# Altium PCB PCB1.PcbDoc
Units mm, origin at the board's own origin, x right, y up, seen from the top; angles counter-clockwise.
Board outline 40.04 x 64.55 mm, 2 copper layers (Top Layer, Bottom Layer); 12 components, 9 nets, 44 pads, 4 vias.
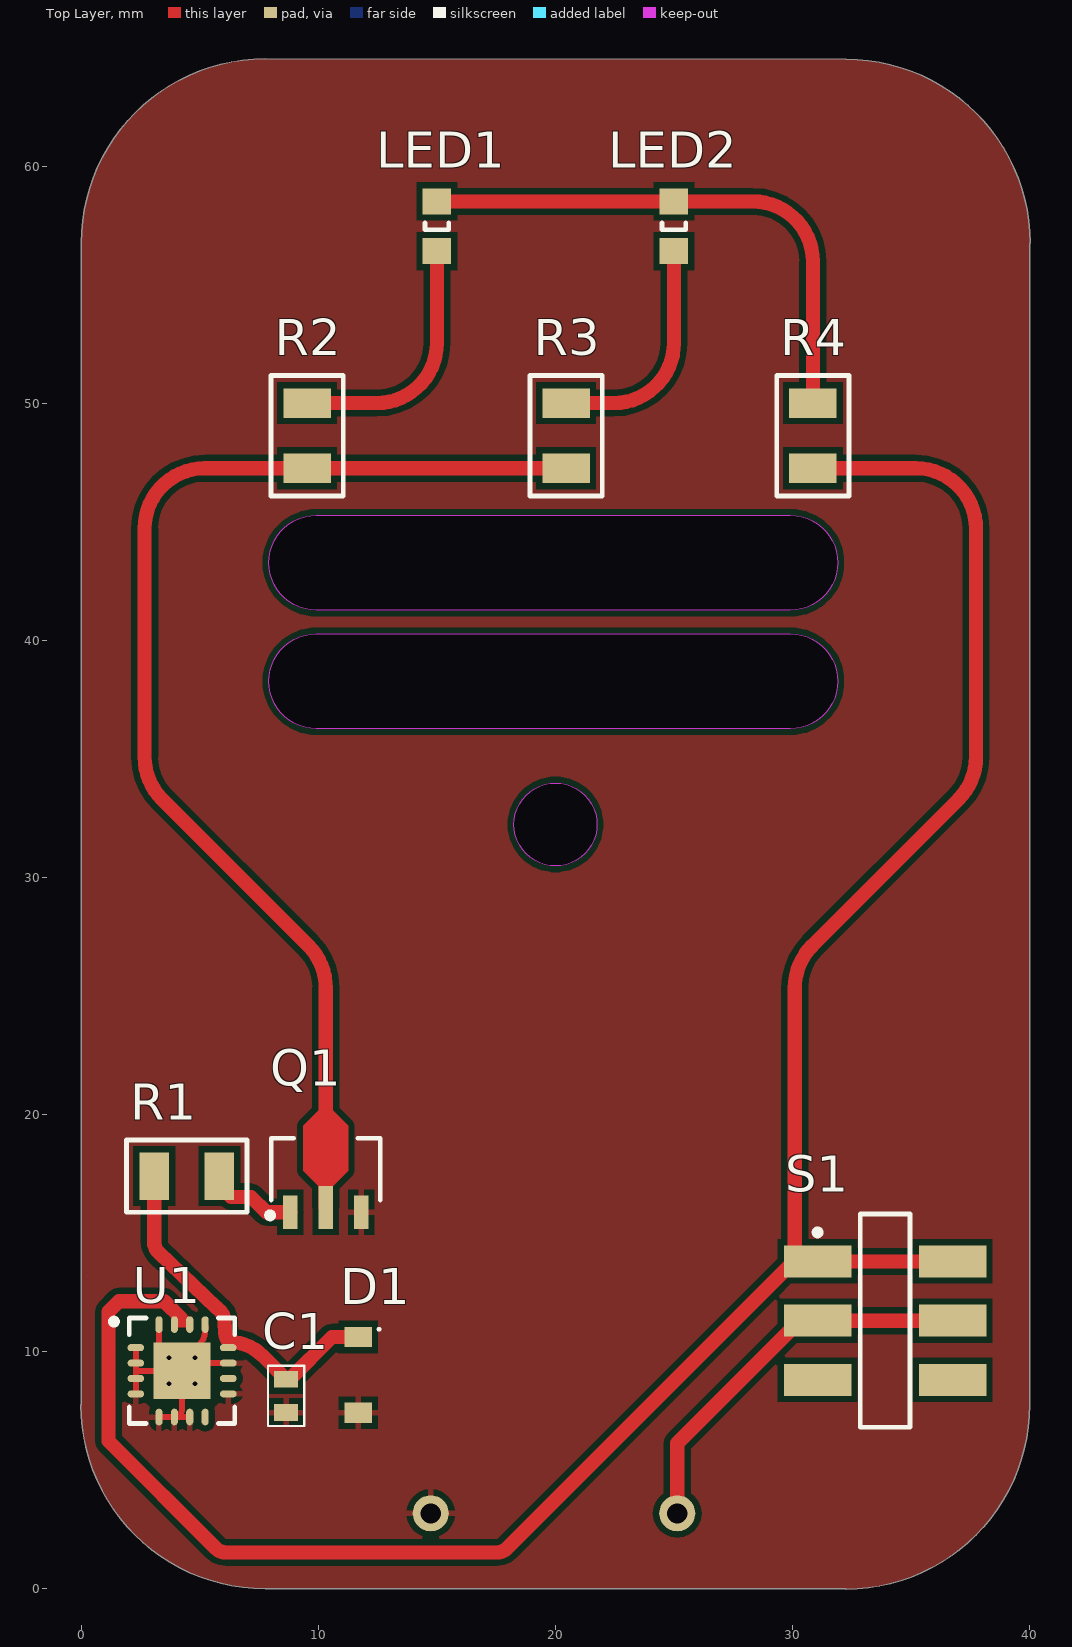
[diagram p0: Top Layer view]
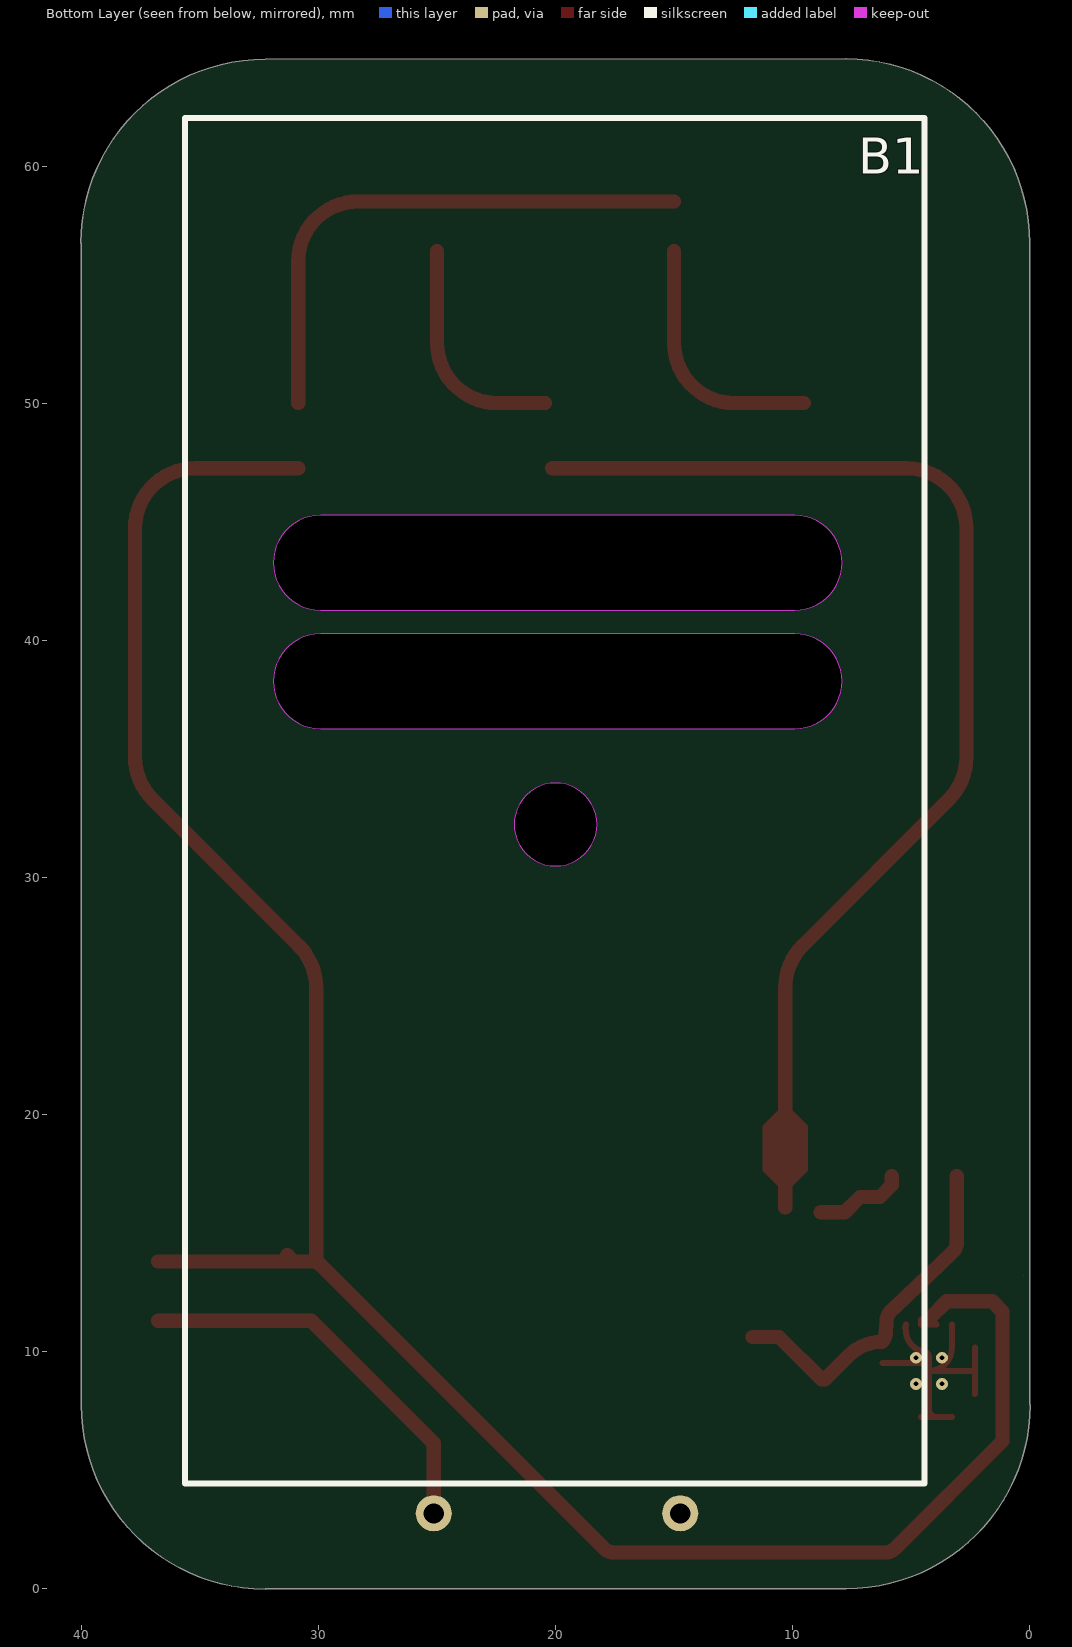
[diagram p1: Bottom Layer view, seen from below]

## Layer stack, top to bottom
Top Solder: solder mask 0.0102, Solder Resist, Dk 3.5
Top Layer: signal copper 0.0356
Dielectric 1: dielectric 0.32, FR-4, Dk 4.8
Bottom Layer: signal copper 0.0356
Bottom Solder: solder mask 0.0102, Solder Resist, Dk 3.5

## Board outline
7.747,-0.001 cw(c7.728,7.744) -0.017,7.747 0,7.747 0,56.769 -0.001,56.769 cw(c7.744,56.788) 7.747,64.533 32.258,64.516 32.258,64.517 cw(c32.277,56.772) 40.022,56.769 40.005,56.769 40.005,7.747 40.006,7.747 cw(c32.261,7.728) 32.258,-0.017 32.258,0
cut-out: 29.913,36.281 9.913,36.281 cw(c9.913,38.281) 9.913,40.281 29.913,40.281 cw(c29.913,38.281)
cut-out: 20,30.488 cw(c20,32.238) 18.25,32.238 cw(c20,32.238) 20,33.988 cw(c20,32.238) 21.75,32.238 cw(c20,32.238)
cut-out: 29.913,41.279 9.913,41.279 cw(c9.913,43.279) 9.913,45.279 29.913,45.279 cw(c29.913,43.279)
cut-out: 0.254,13.208

## Design rules (kind name [scope] priority, off if disabled: settings)
Clearance Clearance_1 [All] p1: gap=0.254 ignorepadtopadclearanceinfootprint=FALSE except(0: Arc-Hole Track-Hole SMDPad-Hole THPad-Hole Via-Hole Fill-Hole Poly-Hole Region-Hole Text-Hole)
Clearance [All] p2: gap=0.254 ignorepadtopadclearanceinfootprint=FALSE except(0: Arc-Hole Track-Hole SMDPad-Hole THPad-Hole Via-Hole Fill-Hole Poly-Hole Region-Hole Text-Hole)
MinimumSolderMaskSliver [All] p1: minsoldermaskwidth=0.145
PolygonConnect [All] p1: connectstyle=Relief reliefconductorwidth=0.254 reliefentries=4 polygonreliefangle="90 Angle" airgapwidth=0.254
RoutingCorners [All] p1: cornerstyle=Round minsetback=2.54 maxsetback=2.54
RoutingVias [All] p1: holewidth=0.711 width=1.27 viastyle="Through Hole" minholewidth=0.711 minwidth=1.27 maxholewidth=0.711 maxwidth=1.27
SilkToSolderMaskClearance [IsPad] p1: minsilkscreentomaskgap=0.1 clearancetoexposedcopper=TRUE
SolderMaskExpansion [All] p1: expansion=0.102 istentingtop=FALSE
Width [All] p1: maxlimit=1 minlimit=0.254 preferedwidth=0.6
27 further rules are at their usual default settings.

## Classes and differential pairs
component class Sheet1: B1 C1 D1 LED1 LED2 Q1 R1 R2 R3 R4 S1

## Components (designator, comment, footprint, x,y, rotation, side; value= is the part's Value field where it differs from the comment)
B1 "SN3-2PC" "BATTERY HOLDER" 19.939,3.937 r0 bottom
C1 "Cap" "Capacitor 0603" 8.636,8.128 r90 top value=4.7μF
D1 "RB168M-40TR" SODFL350X90-2N 11.684,9.017 r270 top
LED1 "150080RS75000" 0805_A 15,57.474 r90 top
LED2 "150080RS75000" 0805_A 25,57.474 r90 top
Q1 "2SC5785(TE12L,F)" SOT89-150P410X160-3N 10.311,17.675 r90 top
R1 "Res1" "Resistor 1206" 4.445,17.399 r0 top value=3.8K
R2 "Res1" "Resistor 1206" 9.525,48.641 r90 top value=50R
R3 "Res1" "Resistor 1206" 20.447,48.641 r90 top value=50R
R4 "Res1" "Resistor 1206" 30.861,48.641 r270 top value=50R
S1 "SW-SPDT" "JS202011SCQN Switch" 33.909,11.303 r0 top
U1 "ADXL335BCPZ" ADI-CP-16-14_L 4.247,9.189 r0 top

## Footprints (in the part's own frame and the unit in brackets; to place one, negate y for a bottom-side part, rotate by r counter-clockwise, add the part's x,y. Pads: shape width x height; smd on the part's side, far side on the other; paste and mask are expansions set on the pad)
0805_A [mm] "Chip LED, 2-Leads, Body 2.0x1.3mm, IPC Medium Density"
  rect 1.1x1.2 smd: 1(-1.05,0) 2(1.05,0)
  silkscreen extent -0.15,-0.5 0.15,0.5, body extent -1,-0.62 1,0.63, height 0.68
ADI-CP-16-14_L [mm] "QFN, 16-Leads, Body 4x4mm, Pitch 0.65mm, Thermal Pad 2.4x2.4mm, IPC High Density"
  oval 0.7x0.3 smd: 1(-1.95,0.975) 2(-1.95,0.325) 3(-1.95,-0.325) 4(-1.95,-0.975) 9(1.95,-0.975) 10(1.95,-0.325) 11(1.95,0.325) 12(1.95,0.975)
  oval 0.3x0.7 smd: 5(-0.975,-1.95) 6(-0.325,-1.95) 7(0.325,-1.95) 8(0.975,-1.95) 13(0.975,1.95) 14(0.325,1.95) 15(-0.325,1.95) 16(-0.975,1.95)
  rect 2.4x2.4 smd: 17(0,0)
  silkscreen extent -3,-2.22 2.22,2.23, body extent -2.08,-2.07 2.07,2.08, height 1.5
"BATTERY HOLDER" [mil]
  round 60 hole 33.46: 1(204.72,30) 2(-204.72,30)
  silkscreen extent -611,-2287 618,-20
"Capacitor 0603" [mm]
  rect 0.7x1 smd: 1(-0.7,0) 2(0.7,0)
  silkscreen extent -1.27,-0.76 1.27,0.76
"JS202011SCQN Switch" [mm] "SOTFL, 6-Leads, Body 9.00x8.00mm, Pitch 2.50mm, IPC Medium Density"
  rect 2.85x1.35 smd: 1(-2.85,2.5) 1(2.85,2.5) 2(-2.85,0) 2(2.85,0) 3(-2.85,-2.5) 3(2.85,-2.5)
  silkscreen extent -2.97,-4.5 1.05,4.5, body extent -1.5,-4.5 1.5,4.5, height 5.5
"Resistor 1206" [mm]
  rect 1.25x2 smd: 1(-1.375,0) 2(1.375,0)
  silkscreen extent -2.54,-1.52 2.54,1.52
SODFL350X90-2N [mm] "SODFL, 2-Leads, Body 1.60x3.50mm, IPC Medium Density"
  rect 0.85x1.15 smd: 1(-1.6,0) 2(1.6,0)
  silkscreen extent -1.97,0.83 -1.88,0.92, body extent -1.35,-0.85 1.35,0.85, height 0.9
SOT89-150P410X160-3N [mm] "SOT89, 3-Leads, Body 4.50x2.45mm, Pitch 1.50mm, Lead Span 4.1mm, IPC Medium Density"
  rect 1.4x0.6 smd: 1(-1.8,1.5) 3(-1.8,-1.5)
  rect 1.8x0.6 smd: 2(-1.6,0)
  Top Layer region: -0.7,0.3 -0.05,0.95 1.85,0.95 2.5,0.3 2.5,-0.3 1.85,-0.95 -0.05,-0.95 -0.7,-0.3
  silkscreen extent -2.05,-2.3 1.32,2.47, body extent -1.28,-2.3 1.32,2.3, height 1.6

## Part data
B1: "Battery Holder with Lead Wire / Pin / Snap Terminal", Manufacturer=Takachi, Supplier Part Number 1=1756074, Manufacturer Part Number=SN3-2PC, RoHS=No, Stock 1=65, Supplier 1=RSComponents
C1: "Capacitor", LatestRevisionDate=17-Jul-2002, LatestRevisionNote="Re-released for DXP Platform.", PackageDescription="Radial Cap, Thru-Hole; 2 Leads; 0.3 in Pin Spacing", PackageReference=RAD-0.3, Published=8-Jun-2000, Publisher="Altium Limited"
D1: "DIODE SCHOTTKY 40V 1A PMDU", Average Rectified Current=1A, Case/Package=SOD-123-2, Forward Voltage=600mV, Manufacturer=Rohm, Max Forward Surge Current (Ifsm)=30A, Max Operating Temperature=150°C, Max Repetitive Reverse Voltage (Vrrm)=40V, Max Reverse Current=50nA, Min Operating Temperature=-55°C, Package Quantity=3000, Supplier Part Number 1=7526111, Category="Rectifier Diodes", ComponentLink1Description=https://datasheet.ciiva.com/29592/rb168m-40-29592360.pdf?src-supplier=Digi-Key, ComponentLink1URL=https://datasheet.ciiva.com/29592/rb168m-40-29592360.pdf?src-supplier=Digi-Key, ComponentLink2Description=https://datasheet.ciiva.com/14920/diodekousei-14920856.pdf?src-supplier=Digi-Key, ComponentLink2URL=https://datasheet.ciiva.com/14920/diodekousei-14920856.pdf?src-supplier=Digi-Key, ComponentLink3Description=https://datasheet.ciiva.com/29592/diodekousei-29592361.pdf?src-supplier=Digi-Key, ComponentLink3URL=https://datasheet.ciiva.com/29592/diodekousei-29592361.pdf?src-supplier=Digi-Key, Element Configuration=Single, Forward Current=1A, Height=0.8mm, Lead Free="Lead Free", Length=2.6mm, Manufacturer Part Number=RB168M-40TR, Max Reverse Voltage (DC)=40V, Mount="Surface Mount", Number of Pins=2, Packaging="Tape and Reel", Peak Non-Repetitive Surge Current=30A, Radiation Hardening=No, Reverse Voltage (DC)=40V, RoHS=Yes, Stock 1=1110, Supplier 1=RSComponents, Termination=SMD/SMT, Weight=0.000363oz, Width=1.6mm
LED1 LED2: library part CMP-1426-00011-1, "SMD mono-color Chip LED, WL-SMCW, Red", Color=Red, Manufacturer="Wuerth Elektronik", ComponentLink1Description="Manufacturer URL", ComponentLink1URL=http://www.we-online.com, ComponentLink2Description=Datasheet, ComponentLink2URL=http://katalog.we-online.com/led/datasheet/150080RS75000.pdf, PackageReference=0805_A, PartNumber=150080RS75000
Q1: "NPN Bipolar Transistor, 2 A, 10 V, 3-Pin SC-62", Manufacturer=Toshiba, Supplier Part Number 1=7560281, Category=Uncategorized, Manufacturer Part Number=2SC5785(TE12L,F), RoHS=No, Stock 1=40, Supplier 1=RSComponents
R1 R2 R3 R4: "Resistor", LatestRevisionDate=17-Jul-2002, LatestRevisionNote="Re-released for DXP Platform.", PackageDescription="Axial Device, Thru-Hole; 2 Leads; 0.3 in Pin Spacing", PackageReference=AXIAL-0.3, Published=8-Jun-2000, Publisher="Altium Limited"
S1: "SPDT Subminiature Toggle Switch, Right Angle Mounting, Vertical Actuation", ComponentLink1Description="Manufacturer Link", ComponentLink1URL=http://www.apem.com, DatasheetVersion=05-Dec-2000, LatestRevisionDate=17-Dec-2003, LatestRevisionNote="Schematic revised, PCB Footprint replaced.", PackageDescription="Switch; 4 Leads", PackageReference=TL36WW15050, Published=24-Mar-1999, Publisher="Altium Limited"
U1: library part CMP-0885-00046-1, "Small, Low Power, 3-Axis +/-3 g Accelerometer with Analog Output, 1.6 KHz BW, Industrial, 16-pin QFN, Tray", Manufacturer="Analog Devices", Supply Current="350 uA", Voltage Supply (V)="1.8 to 3.6", # of Axes=3, -3dB Bandwidth="1.6 KHz", Code_JEDEC=MO-220-WGGD, ComponentLink1Description="Manufacturer URL", ComponentLink1URL=http://www.analog.com/en/index.html, ComponentLink2Description=Datasheet, ComponentLink2URL=http://www.analog.com/static/imported-files/data_sheets/ADXL335.pdf, ComponentLink3Description="Package Specification", ComponentLink3URL=http:/www.analog.com/static/imported-files/packages/PKG_PDF/LFCSP(CP)/CP-16/CP_16_14.pdf, ComponentLink4Description="Product URL", ComponentLink4URL=http://www.analog.com/en/mems-sensors/mems-inertial-sensors/adxl335/products/product.html, DatasheetVersion="Rev. B", Mounting Technology="Surface Mount", Output Type=Analog, PackageDescription="16-Pin Lead Frame Chip Scale Package, 4 x 4 mm Body, 0.65 mm Pitch", PackageReference=CP-16-14, PackageVersion="051909-A, 05/2009", Packing=Tray, PartNumber=ADXL335BCPZ, Sensitivity="300 mV/g"

## Via types
v1: diameter 0.5, hole 0.2, Top Layer to Bottom Layer, 4 vias

## Nets (pads, with @x,y where several pads share a name; then routed paths per layer and width w, separated by ;. In a path a pad name is that pad's centre, name@x,y a point inside that pad or via, vN(x,y) a via of type N, cw(c..) or ccw(c..) an arc to the next point about the centre after c; other vN are vias at no path point)
ACC_Out: C1.2 D1.1 R1.1 U1.12 | length 15
  Top Layer w0.6: R1.1 3.07,14.619 ccw(c3.67,14.619) 3.255,14.186 5.707,11.849 cw(c5.222,11.339) 5.709,11.848 5.845,11.717 cw(c5.432,11.282) 6.032,11.286 ccw(c6.632,11.291) 6.034,11.247 6.068,10.776 ccw(c6.666,10.82) 6.197,10.446 6.223,10.414 cw(c6.223,8.417) 7.635,9.829 C1.2 8.786,8.828 10.575,10.617 D1.1
GND: B1.2 C1.1 D1.2 Q1.3 U1.1 U1.2 U1.3 U1.4 U1.5 U1.6 U1.7 U1.9 U1.11 U1.13 U1.16 U1.17 | length 14.4
  Top Layer w0.254: U1.4 U1.3 2.297,9.189 ; U1.1 U1.2 2.297,9.189 ; U1.5 U1.6 ; U1.16 3.272,10.164 ccw(c4.247,10.164) U1.17@4.245,9.189 ; U1.7 U1.6 ; U1.13 5.239,11.079 cw(c4.994,11.011) 5.242,10.958 5.22,10.855 ccw(c5.469,10.802) 5.215,10.82 cw(c4.328,10.884) 4.462,10.004 ccw(c4.501,9.753) 4.247,9.753 U1.17 ; U1.11 4.572,9.514 ccw(c4.572,9.189) U1.17 ; 2.297,9.189 U1.17@4.245,9.189 ; U1.6 ccw(c3.922,7.562) 4.245,7.562 U1.17@4.245,9.189 ; U1.17@4.245,9.189 U1.17
  other v1: 3.697,8.639 4.797,8.639 3.697,9.739 4.797,9.739
NetLED1_1: LED1.1 R2.2 | length 10.8
  Top Layer w0.6: R2.2 12.46,50.016 ccw(c12.46,52.556) 15,52.556 LED1.1
NetLED1_2: LED1.2 LED2.2 R4.1 | length 23.3
  Top Layer w0.6: LED1.2 LED2.2 28.321,58.524 cw(c28.321,55.984) 30.861,55.984 R4.1
NetLED2_1: LED2.1 R3.2 | length 9.9
  Top Layer w0.6: R3.2 22.46,50.016 ccw(c22.46,52.556) 25,52.556 LED2.1
NetQ1_1: Q1.1 R1.2 | length 3.8
  Top Layer w0.6: R1.2 5.82,17.024 6.318,16.526 7.153,16.526 7.804,15.875 Q1.1
NetQ1_2: Q1.2 R2.1 R3.1 | length 50.5
  Top Layer w0.6: Q1.2 10.311,25.34 ccw(c7.771,25.34) 9.567,27.136 3.411,33.292 cw(c5.207,35.088) 2.667,35.088 2.667,44.726 cw(c5.207,44.726) 5.207,47.266 R2.1 R3.1@20.14,47.266
V_Batt: B1.1 S1.2 | length 16.7
  Top Layer w0.6: B1.1 25.139,6.133 30.309,11.303 31.059,11.303 S1.2@36.759,11.303
VCC: R4.2 S1.1 U1.14 U1.15 | length 95.9
  Top Layer w0.254: U1.15 U1.14 4.572,11.327 4.551,11.348 4.363,11.348 4.292,11.419 4.202,11.419 U1.15
  Top Layer w0.6: 4.202,11.419 3.499,12.122 1.581,12.122 1.143,11.684 1.143,6.223 5.666,1.7 ccw(c6.091,2.124) 6.091,1.524 17.531,1.524 ccw(c17.531,2.124) 17.956,1.7 29.883,13.627 cw(c30.308,13.203) S1.1@30.308,13.803 ; R4.2 35.203,47.266 cw(c35.203,44.726) 37.743,44.726 37.743,35.088 cw(c35.203,35.088) 36.999,33.292 30.843,27.136 ccw(c32.639,25.34) 30.099,25.34 30.099,14.012 ccw(c30.308,14.012) S1.1@30.308,13.803 ; S1.1@31.32,14.064 S1.1@31.059,13.803 ; S1.1@36.759,13.803 S1.1@31.059,13.803 ; S1.1@30.308,13.803 S1.1@31.059,13.803
pads on no net: S1.3 U1.8 U1.10

## Polygon pours and split planes (outlines as drawn)
GND on Top Layer "GND_L01_P000" (solid, pour order 0): 7.747,-0.001 cw(c7.728,7.744) -0.017,7.747 0,7.747 0,56.769 -0.001,56.769 cw(c7.744,56.788) 7.747,64.533 32.258,64.516 32.258,64.517 cw(c32.277,56.772) 40.022,56.769 40.005,56.769 40.005,7.747 40.006,7.747 cw(c32.261,7.728) 32.258,-0.017 32.258,0

## Silkscreen, mask and mechanical layers (free items; w line width, h text height)
Mechanical 1:
  circle w0.254: c20,32.238 r1.75
  pour cut-out: 29.913,36.281 9.913,36.281 cw(c9.913,38.281) 9.913,40.281 29.913,40.281 cw(c29.913,38.281)
  lines w0.254: 0,7.747 0,56.769 ; 7.747,0 32.258,0 ; 7.747,64.533 32.258,64.516 ; 40.005,7.747 40.005,56.769 ; 9.913,36.281 cw(c9.913,38.281) 9.913,40.281 29.913,40.281 cw(c29.913,38.281) 29.913,36.281 9.913,36.281 ; 9.913,41.279 cw(c9.913,43.279) 9.913,45.279 29.913,45.279 cw(c29.913,43.279) 29.913,41.279 9.913,41.279
Mechanical 13:
  lines w0.254: -0.017,7.747 ccw(c7.728,7.744) 7.747,-0.001 ; -0.001,56.769 cw(c7.744,56.788) 7.747,64.533 ; 32.258,-0.017 ccw(c32.261,7.728) 40.006,7.747 ; 32.258,64.517 cw(c32.277,56.772) 40.022,56.769